# Altium PCB JCM800-2204-Power.PcbDoc
Units mm, origin at the board's own origin, x right, y up, seen from the top; angles counter-clockwise.
Board outline 151.89 x 75.69 mm, 2 copper layers (Top Layer, Bottom Layer); 12 components, 68 nets, 28 pads, 0 vias.
Unrouted connection lines stored in the file: 8.
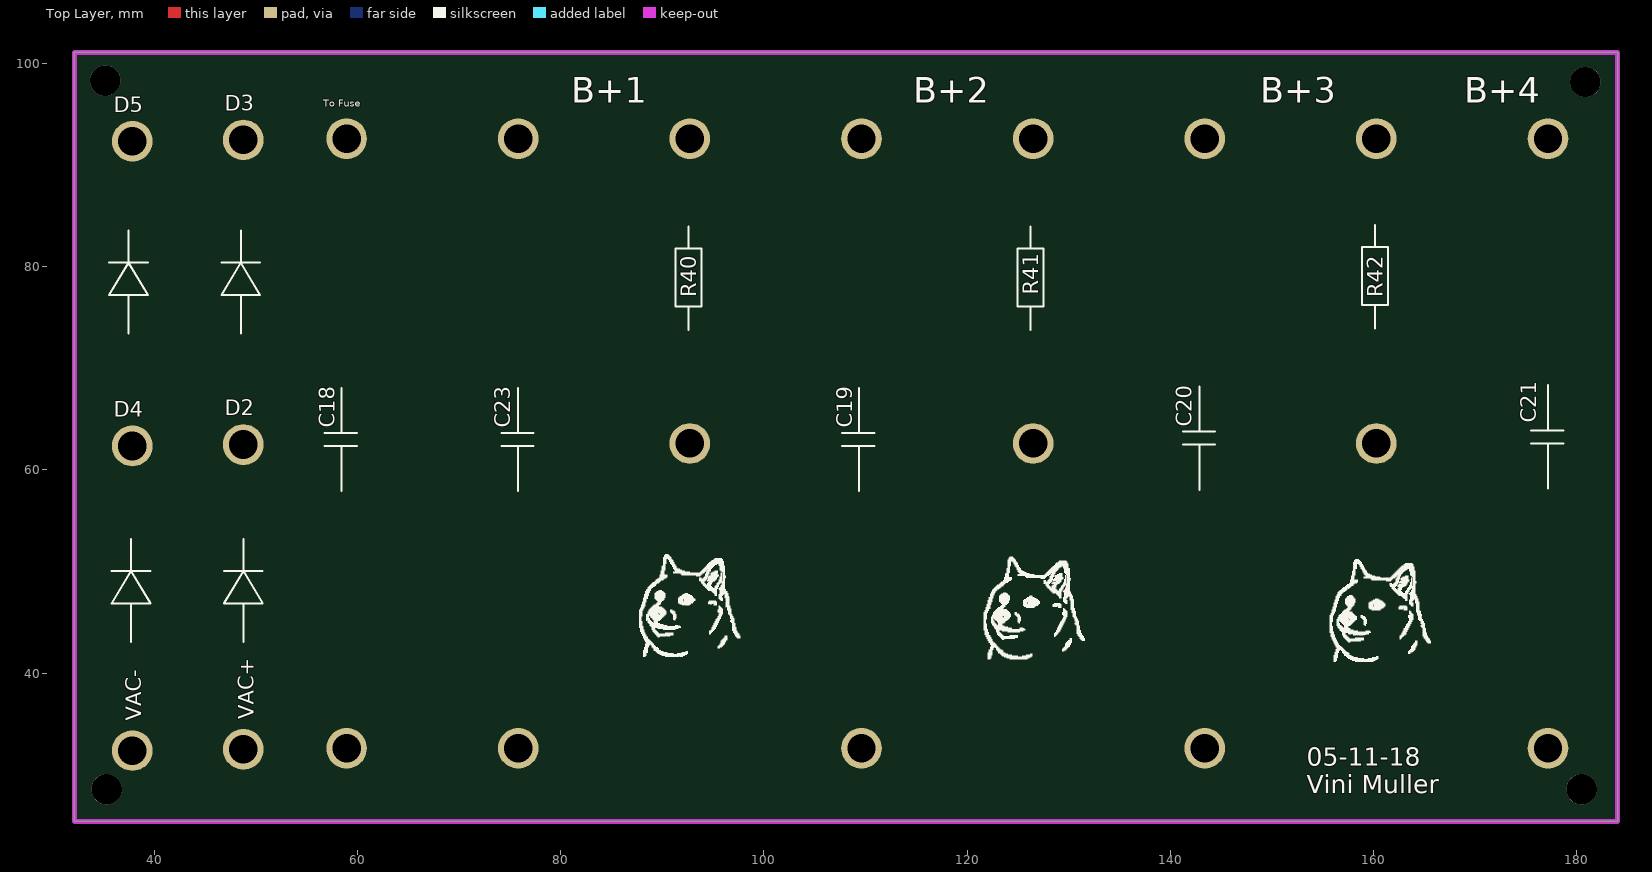
[diagram p0: Top Layer view]
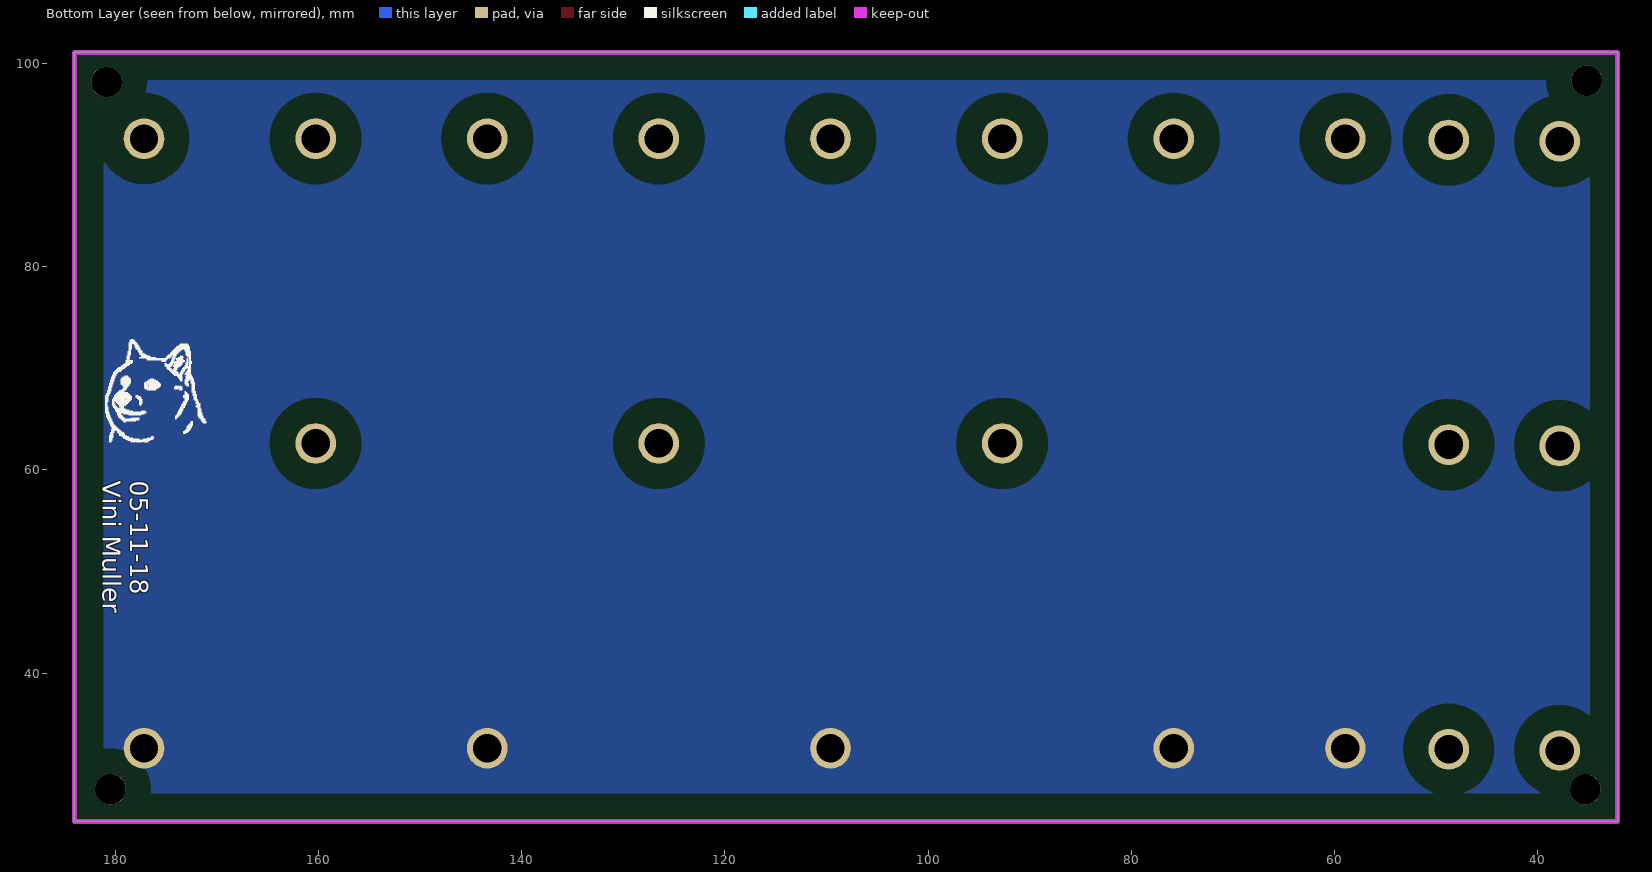
[diagram p1: Bottom Layer view, seen from below]

## Layer stack, top to bottom
Top Solder: solder mask 0.0102, Solder Resist, Dk 3.5
Top Layer: signal copper 0.0356
Dielectric 1: dielectric 0.32, FR-4, Dk 4.8
Bottom Layer: signal copper 0.0356
Bottom Solder: solder mask 0.0102, Solder Resist, Dk 3.5

## Board outline
32.131,25.4 184.023,25.4 184.023,101.092 32.131,101.092

## Design rules (kind name [scope] priority, off if disabled: settings)
Clearance [All] p1: gap=2.5
ComponentClearance [All] p1 off: gap=0.254 collisioncheckmode=3 verticalgap=0.254 showdistances=FALSE
Height [All] p1 off: minheight=0 maxheight=25.4 prefheight=12.7
PlaneConnect [All] p1: planeconnectstyle=Direct reliefexpansion=0.508 reliefentries=4 reliefconductorwidth=0.254 reliefairgap=0.254
PolygonConnect [All] p1: connectstyle=Direct reliefconductorwidth=0.254 reliefentries=4 polygonreliefangle="90 Angle" airgapwidth=0.254
RoutingVias [All] p1: holewidth=0.711 width=1.27 viastyle="Through Hole" minholewidth=0.711 minwidth=1.27 maxholewidth=0.711 maxwidth=1.27
SolderMaskExpansion [All] p1: expansion=0.102
Width [All] p1: maxlimit=0.254 minlimit=0.254 preferedwidth=0.254
27 further rules are at their usual default settings.

## Components (designator, comment, footprint, x,y, rotation, side; value= is the part's Value field where it differs from the comment)
C18 "Cap-cer-RSV-50V-0805" "6cm Turret" 58.928,62.597 r180 top
C19 "Cap-cer-RSV-50V-0805" "6cm Turret" 109.601,62.597 r180 top
C20 "Cap-cer-RSV-50V-0805" "6cm Turret" 143.383,62.597 r180 top
C21 "Cap-cer-RSV-50V-0805" "6cm Turret" 177.165,62.597 r180 top
C23 "Cap-cer-RSV-50V-0805" "6cm Turret" 75.819,62.597 r180 top
D2 "1N4148" "3cm Turret" 48.768,47.498 r0 top
D3 "1N4148" "3cm Turret" 48.768,77.47 r0 top
D4 "1N4148" "3cm Turret" 37.846,47.371 r0 top
D5 "1N4148" "3cm Turret" 37.846,77.343 r0 top
R40 "Res-10K-0805-1%-1/8W" "3cm Turret" 92.71,77.597 r0 top
R41 "Res-10K-0805-1%-1/8W" "3cm Turret" 126.492,77.597 r0 top
R42 "Res-10K-0805-1%-1/8W" "3cm Turret" 160.274,77.597 r0 top

## Footprints (in the part's own frame and the unit in brackets; to place one, negate y for a bottom-side part, rotate by r counter-clockwise, add the part's x,y. Pads: shape width x height; smd on the part's side, far side on the other; paste and mask are expansions set on the pad)
"3cm Turret" [mm]
  round 4 hole 2.8: 1(0,-15) 2(0,15)
  body extent -1.59,-16.59 1.59,16.59, height 5.32
"6cm Turret" [mm]
  round 4 hole 2.8: 1(0,-30) 2(0,30)
  body extent -1.59,-31.59 1.59,31.59, height 5.32

## Part data
C18 C19 C20 C21 C23: "Capacitor, ceramic, RSV, 50V, 0805"
D2 D3 D4 D5: library part Diode-1N4148, "Diode"
R40 R41 R42: "Resistor, 10K, 0805, 1%, 1/8W"

## Free pads (board coordinates)
  round 3 hole 3: 0(35.179,98.298) 0(35.306,28.575) 0(180.467,28.575) 0(180.848,98.171)

## Nets (pads, with @x,y where several pads share a name; then routed paths per layer and width w, separated by ;. In a path a pad name is that pad's centre, name@x,y a point inside that pad or via, vN(x,y) a via of type N, cw(c..) or ccw(c..) an arc to the next point about the centre after c; other vN are vias at no path point)
"4 OHMS": 
"8 OHMS": 
"16 OHMS": 
B: 
B+: 
B+1: C23.1 R40.2
B+2: C19.1 R40.1 R41.2
B+4: C21.1 R42.1
BASSPOT: 
C: 
GAINPOT: 
GND: C18.2 C19.2 C20.2 C21.2 C23.2
MIDPOT: 
Net*_2: 
NetC1_1: 
NetC1_2: 
NetC3_1: 
NetC4_2: 
NetC8_2: 
NetC14_2: 
NetC16_1: 
NetC17_1: 
NetC18_1: C18.1 D3.2 D5.2
NetD1_2: 
NetD2_2: D2.2 D3.1
NetD4_2: D4.2 D5.1
NetDS1_1: 
NetDS1_2: 
NetF2_1: 
NetF2_2: 
NetJ1_1: 
NetJ4_1: 
NetJ4_2: 
NetR3_1: 
NetR6_3: 
NetR10_2: 
NetR12_1: 
NetR29_2: 
NetR32_1: 
NetR34_2: 
NetR36_1: 
NetR38_1: 
NetS1_3: 
NetS3_1: 
NetS3_3: 
NetT1_1: 
NetT1_2: 
PRESPOT: 
TREBPOT: 
V1AG: 
V1AK: 
V1AP: 
V1BG: 
V1BK: 
V1BP: 
V2AG: 
V2AK: 
V2BK: 
V2BP: C20.1 R41.1 R42.2
V3AG: 
V3BG: 
V3K: 
"V4 G2": 
"V4 K": 
"V5 G2": 
VAC+: D2.1
VAC-: D4.1
VOLPOT: 

## Polygon pours and split planes (outlines as drawn)
GND on Bottom Layer "Bottom Layer-No Net" (solid, remove dead copper, pour order 2): 33.528,61.722 33.528,30.226 ccw(c36.068,30.226) 36.068,27.686 110.744,27.686 178.562,27.686 ccw(c178.562,30.226) 181.102,30.226 181.102,64.897 181.102,96.012 ccw(c178.562,96.012) 178.562,98.552 104.775,98.552 35.814,98.552 ccw(c35.814,96.012) 33.274,96.012 33.274,61.722

## Keep-outs
Keep-Out Layer:
  the board outline again, w0.5

## Silkscreen, mask and mechanical layers (free items; w line width, h text height)
Top Overlay:
  drawing of 33088 lines, arcs and shapes, not listed
  text "B+1" at 81.026,96.139 h2.5
  text "B+2" at 114.681,96.139 h2.5
  text "B+3" at 148.844,96.139 h2.5
  text "B+4" at 168.91,96.139 h2.5
  text "To Fuse" at 56.642,95.758 h0.7
  text "VAC+" at 49.784,35.433 h1.5 r90
  text "VAC-" at 38.735,35.306 h1.5 r90
  text "05-11-18 / Vini Muller" at 153.416,28.194 h1.8
Bottom Overlay:
  drawing of 11007 lines, arcs and shapes, not listed
  text "05-11-18 / Vini Muller" at 181.229,58.928 h1.8 r90

## Dimensions
35.306,28.575 to 180.467,28.575 on Mechanical 1